# Altium PCB FanControllerv.PcbDoc
Units mm, origin at the board's own origin, x right, y up, seen from the top; angles counter-clockwise.
Board outline 175 x 100 mm, 2 copper layers (Top Layer, Bottom Layer); 92 components, 77 nets, 336 pads, 138 vias.
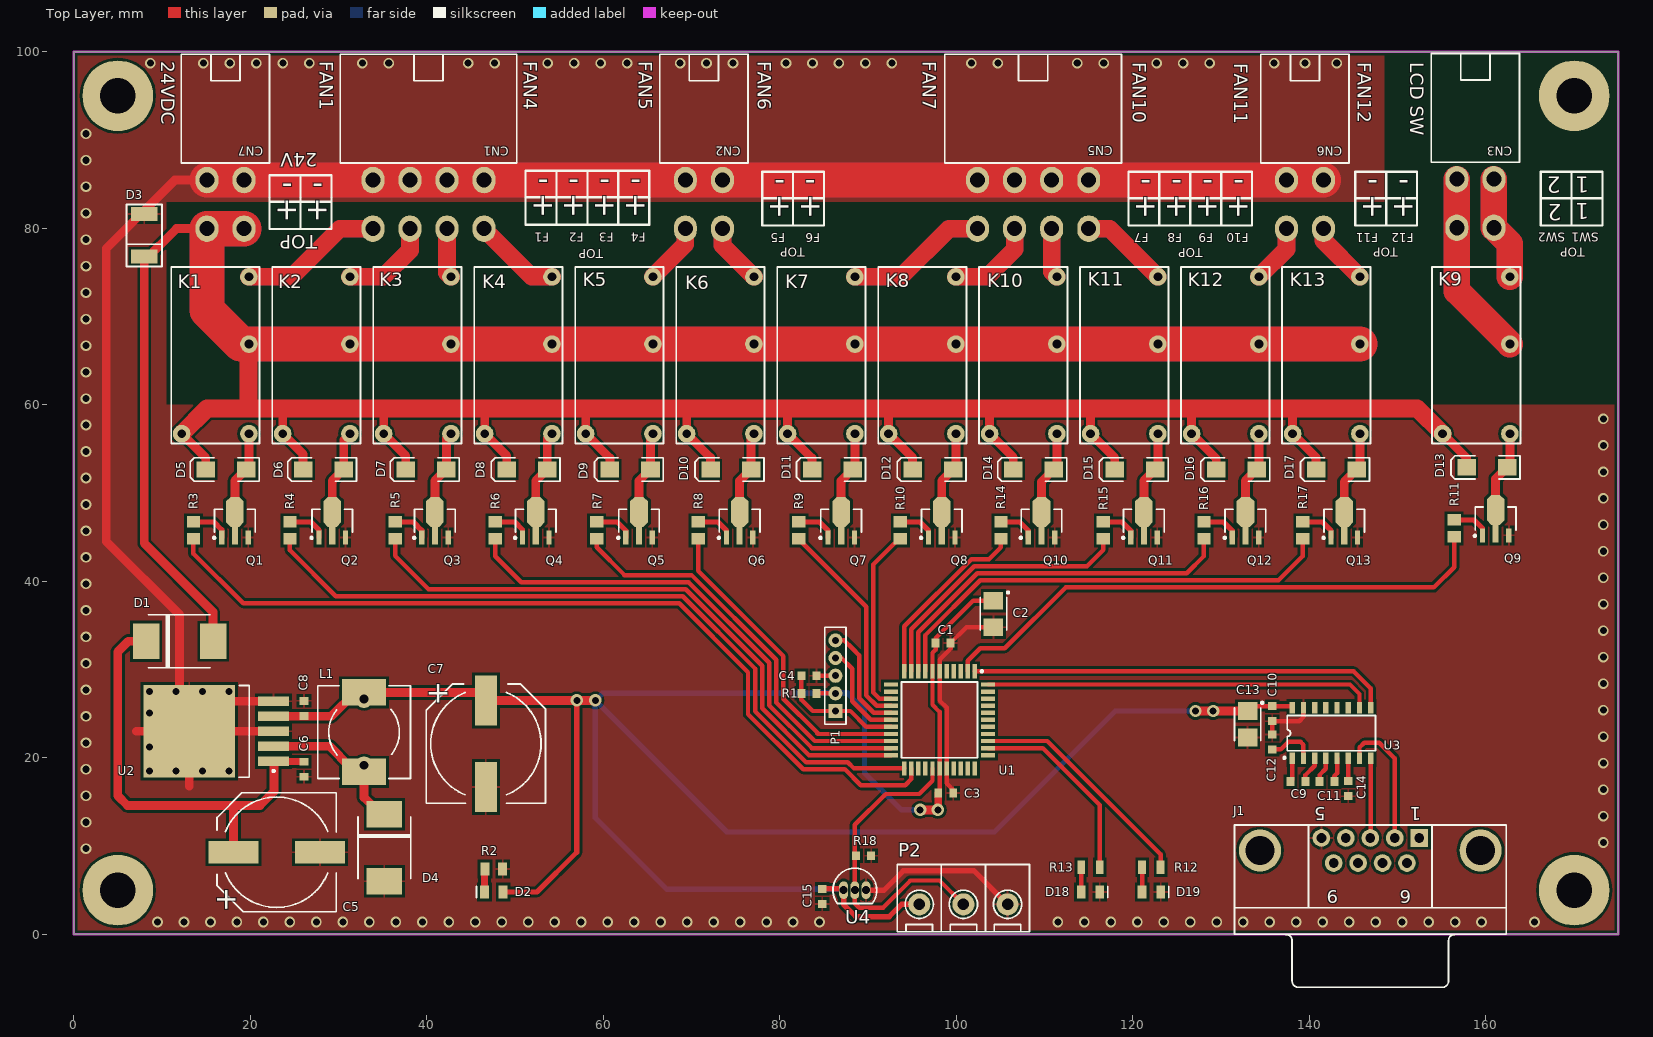
[diagram p0: Top Layer view]
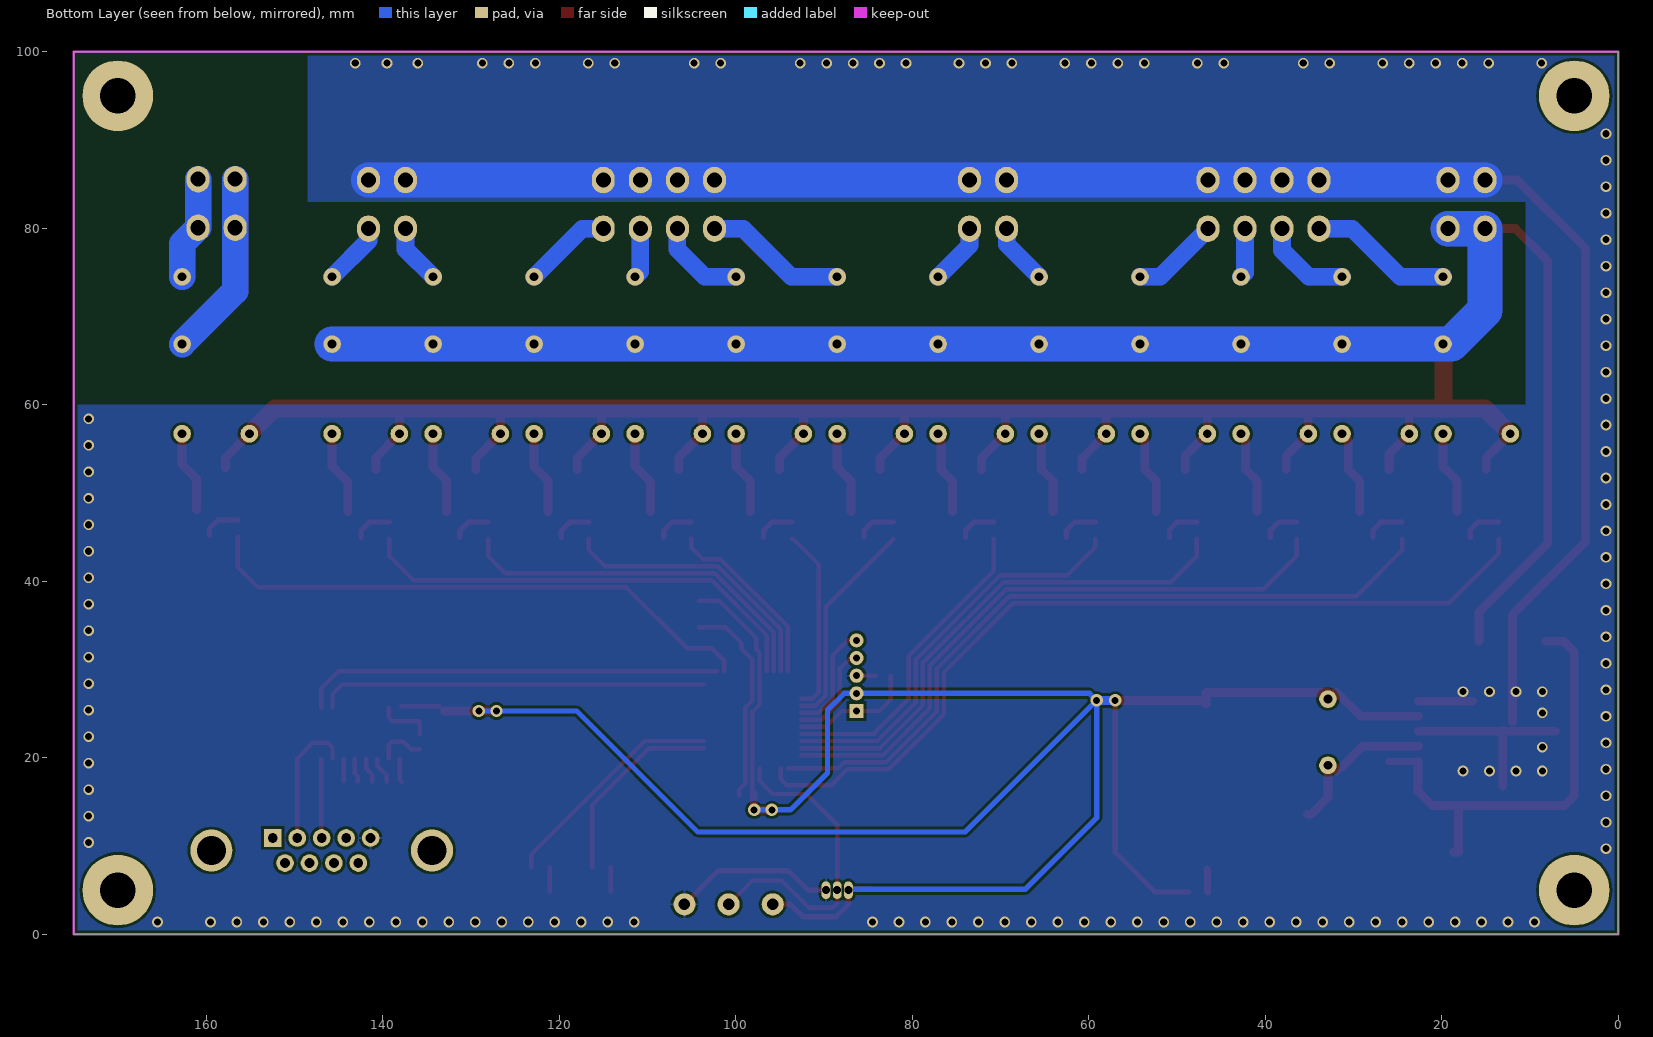
[diagram p1: Bottom Layer view, seen from below]
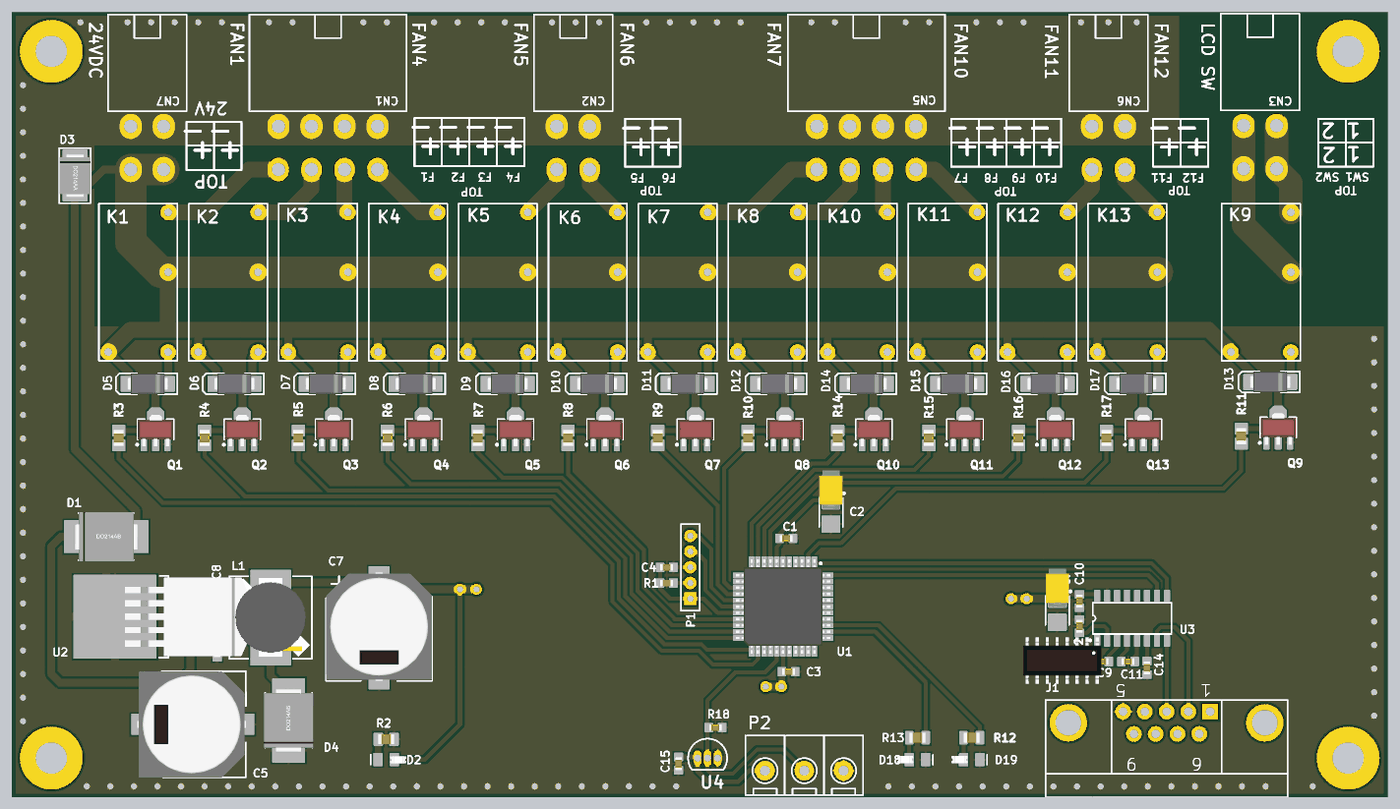
[diagram p2: 3D render of the assembled board from above, using the file's embedded part models]

## Layer stack, top to bottom
Top Layer: signal copper 0.0356
Dielectric: dielectric 0.32, FR-4, Dk 4.8
Bottom Layer: signal copper 0.0356

## Board outline
0,0 175,0 175,100 0,100

## Design rules (kind name [scope] priority, off if disabled: settings)
Clearance [All] p1: gap=0.3
HoleToHoleClearance [All] p1: gap=0.1 allowstackedmicrovias=TRUE
MinimumSolderMaskSliver [All] p1: minsoldermaskwidth=0.1
PasteMaskExpansion [All] p1: expansion=0.1
PlaneConnect [All] p1: planeconnectstyle=Relief reliefexpansion=0.508 reliefentries=4 reliefconductorwidth=0.3 reliefairgap=0.254
PolygonConnect [All] p1: connectstyle=Relief reliefconductorwidth=0.254 reliefentries=4 polygonreliefangle="90 Angle"
RoutingVias [All] p1: holewidth=0.6 width=1 viastyle="Through Hole" minholewidth=0.8 minwidth=1 maxholewidth=1.2 maxwidth=2
SilkscreenOverComponentPads [All] p1: minsilkscreentomaskgap=0.05
SolderMaskExpansion [All] p1: expansion=0.1
TestPointUsage [All] p1: valid=0 allowmultiple=FALSE
Testpoint [All] p1: side=15 testpointundercomponent=TRUE minsize=1.016 maxsize=2.54 preferedsize=1.524 minholesize=0 maxholesize=1.016 preferedholesize=0.813 testpointgrid=0.025 style=1023 order=0-112345678
Width [All] p1: maxlimit=5 minlimit=0.3 preferedwidth=0.3
19 further rules are at their usual default settings.

## Classes and differential pairs
component class Connectors: CN1 CN2 CN3 CN4 CN5 CN6 CN7
component class IO: D5 D6 D7 D8 D9 D10 D11 D12 D13 D14 D15 D16 D17 D18 D19 K1 K2 K3 K4 K5 K6 K7 K8 K9 K10 K11 K12 K13 Q1 Q2 Q3 Q4 Q5 Q6 Q7 Q8 Q9 Q10 Q11 Q12 Q13 R3 R4 R5 R6 R7 R8 R9 R10 R11 R12 R13 R14 R15 R16 R17
component class Main: C1 C2 C3 C4 P1 R1 U1
component class POWER: C5 C6 C7 C8 D1 D2 D3 D4 L1 R2 U2
component class USART: C9 C10 C11 C12 C13 C14 J1 U3
component class Sensor: C15 P2 R18 U4

## Components (designator, comment, footprint, x,y, rotation, side; value= is the part's Value field where it differs from the comment)
C1 "Cap" 3-0603_L 98.5,33 r0 top
C2 "CAP-Tantal" 3528 104.2,36.3 r270 top
C3 "Cap" 3-0603_L 98.8,16 r0 top
C4 "Cap" 3-0603_L 83.3,29.3 r0 top
C5 "Cap Pol1" "CAP Size H13= 12.5x13.8mm" 23,9.3 r90 top
C6 "Cap" 3-0603_L 26.1,18.7 r90 top
C7 "Cap Pol1" "CAP Size H13= 12.5x13.8mm" 46.7,21.6 r0 top
C8 "Cap" 3-0603_L 26.1,25.6 r270 top
C9 "Cap" 3-0603_L 138.7,17.3 r0 top
C10 "Cap" 3-0603_L 135.8,25 r90 top
C11 "Cap" 3-0603_L 142,17.3 r0 top
C12 "Cap" 3-0603_L 135.8,21.8 r270 top
C13 "CAP-Tantal" 3528 133,23.8 r270 top
C14 "Cap" 3-0603_L 144.4,16.5 r90 top
C15 "Cap" 3-0603_L 84.8,4.3 r270 top
CN1 "Connector 4973-08TRNLF" "Connector 4973-08TRNLF" 40.2,82.7 r180 top
CN2 "Connector 4973-04TRNLF" "Connector 4973-04TRNLF" 71.4,82.7 r180 top
CN3 "Connector 4973-04TRNLF" "Connector 4973-04TRNLF" 158.8,82.8 r180 top
CN5 "Connector 4973-08TRNLF" "Connector 4973-08TRNLF" 108.7,82.7 r180 top
CN6 "Connector 4973-04TRNLF" "Connector 4973-04TRNLF" 139.5,82.7 r180 top
CN7 "Connector 4973-04TRNLF" "Connector 4973-04TRNLF" 17.2,82.7 r180 top
D1 "MBRS340T3G" "CASE 403-03 ISSUE E" 12,33.2 r180 top
D2 "LED" "6-0805 - LED" 47.6,4.8 r180 top
D3 "TVS SMAJ48CA" "DO214 AA" 8,79.2 r270 top
D4 "MBRS340T3G" "CASE 403-03 ISSUE E" 35.2,9.8 r90 top
D5 "Diode 1N4007" DO214 17.269,52.667 r180 top
D6 "Diode 1N4007" DO214 28.299,52.667 r180 top
D7 "Diode 1N4007" DO214 39.928,52.667 r180 top
D8 "Diode 1N4007" DO214 51.358,52.667 r180 top
D9 "Diode 1N4007" DO214 63.052,52.667 r180 top
D10 "Diode 1N4007" DO214 74.452,52.667 r180 top
D11 "Diode 1N4007" DO214 85.952,52.667 r180 top
D12 "Diode 1N4007" DO214 97.352,52.667 r180 top
D13 "Diode 1N4007" DO214 160.1,52.9 r180 top
D14 "Diode 1N4007" DO214 108.752,52.667 r180 top
D15 "Diode 1N4007" DO214 120.252,52.667 r180 top
D16 "Diode 1N4007" DO214 131.752,52.667 r180 top
D17 "Diode 1N4007" DO214 143.052,52.667 r180 top
D18 "Yeşil Led" "6-0805 - LED" 115.2,4.8 r0 top
D19 "Kırmızı Led" "6-0805 - LED" 122.1,4.8 r0 top
J1 "D Connector 9" DSUB1.385-2H9 146.9,0 r180 top
K1 "Relay SRS" "RELAY ALQ324" 16.052,65.6 r0 top
K2 "Relay SRS" "RELAY ALQ324" 27.493,65.6 r0 top
K3 "Relay SRS" "RELAY ALQ324" 38.935,65.6 r0 top
K4 "Relay SRS" "RELAY ALQ324" 50.376,65.6 r0 top
K5 "Relay SRS" "RELAY ALQ324" 61.817,65.6 r0 top
K6 "Relay SRS" "RELAY ALQ324" 73.259,65.6 r0 top
K7 "Relay SRS" "RELAY ALQ324" 84.7,65.6 r0 top
K8 "Relay SRS" "RELAY ALQ324" 96.141,65.6 r0 top
K9 "Relay SRS" "RELAY ALQ324" 158.9,65.6 r0 top
K10 "Relay SRS" "RELAY ALQ324" 107.583,65.6 r0 top
K11 "Relay SRS" "RELAY ALQ324" 119.024,65.6 r0 top
K12 "Relay SRS" "RELAY ALQ324" 130.465,65.6 r0 top
K13 "Relay SRS" "RELAY ALQ324" 141.907,65.6 r0 top
L1 "Inductor" EB-221M18G01 32.9,22.9 r180 top
P1 "Header 2mm 5pin" "Header 2mm 5Pin" 86.3,25.3 r90 top
P2 "Connector DG301-5.0 - 3P" "Connector DG301-5.0 - 3P" 98.3,4.1 r0 top
Q1 "BCX56-16" SOT89M 18.269,46.867 r90 top
Q2 "BCX56-16" SOT89M 29.299,46.867 r90 top
Q3 "BCX56-16" SOT89M 40.928,46.867 r90 top
Q4 "BCX56-16" SOT89M 52.358,46.867 r90 top
Q5 "BCX56-16" SOT89M 64.052,46.867 r90 top
Q6 "BCX56-16" SOT89M 75.452,46.867 r90 top
Q7 "BCX56-16" SOT89M 86.952,46.867 r90 top
Q8 "BCX56-16" SOT89M 98.352,46.867 r90 top
Q9 "BCX56-16" SOT89M 161.1,47.1 r90 top
Q10 "BCX56-16" SOT89M 109.652,46.867 r90 top
Q11 "BCX56-16" SOT89M 121.252,46.867 r90 top
Q12 "BCX56-16" SOT89M 132.752,46.867 r90 top
Q13 "BCX56-16" SOT89M 143.952,46.867 r90 top
R1 "Res1" 3-0603_L 83.3,27.3 r0 top
R2 "Res1" 6-0805_M 47.6,7.4 r180 top
R3 "Res1" 6-0805 13.569,45.767 r90 top
R4 "Res1" 6-0805 24.499,45.767 r90 top
R5 "Res1" 6-0805 36.428,45.767 r90 top
R6 "Res1" 6-0805 47.758,45.767 r90 top
R7 "Res1" 6-0805 59.252,45.767 r90 top
R8 "Res1" 6-0805 70.752,45.767 r90 top
R9 "Res1" 6-0805 82.152,45.767 r90 top
R10 "Res1" 6-0805 93.652,45.767 r90 top
R11 "Res1" 6-0805 156.4,46 r90 top
R12 "Res1" "6-0805 - big" 122.1,7.6 r0 top
R13 "Res1" "6-0805 - big" 115.2,7.6 r0 top
R14 "Res1" 6-0805 105.052,45.767 r90 top
R15 "Res1" 6-0805 116.652,45.767 r90 top
R16 "Res1" 6-0805 128.052,45.767 r90 top
R17 "Res1" 6-0805 139.252,45.767 r90 top
R18 "Res1" 3-0603_L 89.5,8.9 r180 top
U1 "PIC16F887" TQFP-44 98.1,24.3 r270 top
U2 "LM2576S-5.0" TS5B_M 16.6,23 r180 top
U3 "MAX232ID" "SOIC16 - big" 142.5,22.8 r0 top
U4 "LM35DZ" TO-92 88.5,5 r270 top

## Footprints (in the part's own frame and the unit in brackets; to place one, negate y for a bottom-side part, rotate by r counter-clockwise, add the part's x,y. Pads: shape width x height; smd on the part's side, far side on the other; paste and mask are expansions set on the pad)
3-0603_L [mm] "Chip Resistor; Body 1.6 x 0.9 mm (LxW typ)"
  rect 0.9x1 smd: 1(-0.85,0) 2(0.85,0)
  body extent -0.81,-0.41 0.81,0.41, height 0.46
6-0805 [mm] "Chip Resistor; Body 2 x 1.2 mm (LxW typ)"
  rect 1.3x1.5 smd: 1(-0.95,0) 2(0.95,0)
  body extent -1.01,-0.63 1.01,0.64, height 0.61
"6-0805 - big" [mm] "Chip Resistor; Body 2 x 1.2 mm (LxW typ)"
  rect 0.9x1.5 smd: 1(-1.05,0) 2(1.05,0)
  body extent -1.01,-0.63 1.01,0.64, height 0.61
"6-0805 - LED" [mm] "Chip LED"
  rect 1x1.5 smd: 1(-1.05,0) 2(1.05,0)
  silkscreen extent 1.96,-0.63 1.96,0.62, body extent -1.03,-0.45 1.03,0.46, height 0.85
6-0805_M [mm] "Chip Resistor; Body 2 x 1.2 mm (LxW typ)"
  rect 1x1.5 smd: 1(-1,0) 2(1,0)
  body extent -1.01,-0.63 1.01,0.64, height 0.61
3528 [mm] "Capacitor, SM Tantalum; Body 3.5 x 2.8 mm (LxW typ)"
  rect 2x2.2 smd: 1(-1.5,0) 2(1.5,0)
  silkscreen extent -2.55,-1.5 1.85,1.78, body extent -2.5,-1.5 2.5,1.5, height 2.11
"CAP Size H13= 12.5x13.8mm" [mm]
  rect 2.5x5.7 smd: 1(0,4.9) 2(0,-4.9)
  silkscreen extent -6.75,-6.76 6.75,6.75, body extent -6.75,-6.76 6.75,7.04, height 13.5
"CASE 403-03 ISSUE E" [mm] "CASE 403-03 ISSUE E"
  rect 3x4 smd: 1(-3.8,0) 2(3.8,0)
  silkscreen extent -3.48,-3 3.53,3, body extent -4.06,-3.14 4.06,3.16, height 2.67
"Connector 4973-04TRNLF" [mm]
  oval 2.6x3 hole 1.7: 1(-2.1,-2.75) 2(-2.1,2.75) 3(2.1,-2.75) 4(2.1,2.75)
  silkscreen extent -5,-17 5,-4.67
"Connector 4973-08TRNLF" [mm]
  oval 2.6x3 hole 1.7: 1(-6.3,-2.75) 2(-6.3,2.75) 3(-2.1,-2.75) 4(-2.1,2.75) 5(2.1,-2.75) 6(2.1,2.75) 7(6.3,-2.75) 8(6.3,2.75)
  silkscreen extent -10,-17 10,-4.67
"Connector DG301-5.0 - 3P" [mm]
  round 2.5 hole 1.3: 1(-2.5,-0.7) 2(2.5,-0.7) 3(7.5,-0.7)
  silkscreen extent -5,-3.8 10,3.8
DO214 [mm] "DO-214-AC/SMA; 2 C-Bend Leads; Body 5.3 x 2.6 mm, inc. leads (LxW)"
  rect 2.1x1.85 smd: 1(-2.3,0) 2(2.3,0)
  silkscreen extent -3.75,-1.33 4.05,1.33, body extent -2.6,-1.3 2.6,1.3, height 2.4
"DO214 AA" [mm] "DO-214-AA/SMB; 2 C-Bend Leads; Body 5.6 x 3.9 mm, inc. leads (LxW)"
  rect 1.6x3 smd: 1(-2.4,0) 2(2.4,0)
  silkscreen extent -3.48,-2 3.53,2, body extent -2.76,-1.95 2.82,2, height 2.65
DSUB1.385-2H9 [mm] "Connector; D Subminiature; 9 Position; Right Angle; Pitch 1.385 mm"
  rect 2x2 hole 1.1: 1(-5.54,-10.92)
  round 2 hole 1.1: 2(-2.77,-10.92) 3(0,-10.92) 4(2.77,-10.92) 5(5.54,-10.92) 6(-4.155,-8.08) 7(-1.385,-8.08) 8(1.385,-8.08) 9(4.155,-8.08)
  round 4.76 hole 3.26: 10(-12.495,-9.5) 11(12.495,-9.5)
  silkscreen extent -15.4,-12.4 15.4,6
EB-221M18G01 [mm]
  rect 5x3 smd: 1(0,4.5) 2(0,-4.5)
  round 2 hole 1: 1(0,3.75) 2(0,-3.75)
  silkscreen extent -5.25,-5.25 5.25,5.25, body extent -5,-5.02 5,4.98, height 4.7
"Header 2mm 5Pin" [mm] "10 pin header"
  rect 1.6x1.6 hole 0.8: 1(0,0)
  round 1.6 hole 0.8: 2(2,0) 3(4,0) 4(6,0) 5(8,0)
  silkscreen extent -1.5,-1.2 9.5,1.2
"RELAY ALQ324" [mm] "24V - 5A Relay"
  round 2 hole 1: 1(3.81,8.89) 2(3.81,1.27) 3(-3.81,-8.89) 4(3.81,-8.89)
  silkscreen extent -5,-10 5,10, body extent -4.99,-9.99 5,9.98, height 15.6
"SOIC16 - big" [mm]
  rect 0.6x1.3 smd: 1(-4.445,-2.875) 2(-3.175,-2.875) 3(-1.905,-2.875) 4(-0.635,-2.875) 5(0.635,-2.875) 6(1.905,-2.875) 7(3.175,-2.875) 8(4.445,-2.875) 9(4.45,2.875) 10(3.175,2.875) 11(1.905,2.875) 12(0.635,2.875) 13(-0.635,2.875) 14(-1.905,2.875) 15(-3.175,2.875) 16(-4.445,2.875)
  silkscreen extent -5.45,-2.92 5,2, body extent -5,-2.95 4.98,2.95, height 1.45
SOT89M [mm] "SOT89, 3-Leads, Body 4.5x2.4 mm, Pitch 1.5mm, Lead Span 4.1mm, IPC Low Density"
  rect 1.6x0.6 smd: 1(-1.9,1.5) 3(-1.9,-1.5)
  rect 2x0.7 smd: 2(-1.7,0)
  oct 3.4x2 smd: 2(1,0)
  silkscreen extent -2.07,-2.3 1.3,2.47, body extent -2.18,-2.3 1.82,2.3, height 1.6
TO-92 [mm]
  oval 2x1 hole 0.9: 1(0,-1.27) 2(0,0) 3(0,1.27)
  silkscreen extent -2.48,-2.48 1.5,2.48
TQFP-44 [mm]
  rect 1.6x0.5 smd: 1(-5.5,4) 2(-5.5,3.2) 3(-5.5,2.4) 4(-5.5,1.6) 5(-5.5,0.8) 6(-5.5,0) 7(-5.5,-0.8) 8(-5.5,-1.6) 9(-5.5,-2.4) 10(-5.5,-3.2) 11(-5.5,-4) 23(5.5,-4) 24(5.5,-3.2) 25(5.5,-2.4) 26(5.5,-1.6) 27(5.5,-0.8) 28(5.5,0) 29(5.5,0.8) 30(5.5,1.6) 31(5.5,2.4) 32(5.5,3.2) 33(5.5,4)
  rect 0.5x1.6 smd: 12(-4,-5.5) 13(-3.2,-5.5) 14(-2.4,-5.5) 15(-1.6,-5.5) 16(-0.8,-5.5) 17(0,-5.5) 18(0.8,-5.5) 19(1.6,-5.5) 20(2.4,-5.5) 21(3.2,-5.5) 22(4,-5.5) 34(4,5.5) 35(3.2,5.5) 36(2.4,5.5) 37(1.6,5.5) 38(0.8,5.5) 39(0,5.5) 40(-0.8,5.5) 41(-1.6,5.5) 42(-2.4,5.5) 43(-3.2,5.5) 44(-4,5.5)
  silkscreen extent -5.62,-4.3 4.3,4.93, body extent -6,-6 6,6, height 1.1
TS5B_M [mm] "D2-PAK, 6-Leads, Body 8.6x10.2mm, Pitch 1.7mm, Lead Span 14.1mm, IPC Low Density"
  rect 3.5x1.1 smd: 1(-6.05,3.4) 2(-6.05,1.7) 3(-6.05,0) 4(-6.05,-1.7) 5(-6.05,-3.4)
  rect 10.4x10.5 smd: 6(3.5,0)
  silkscreen extent -6.18,-5.2 -2.11,5.2, body extent -7.73,-5 7.94,5, height 4.78

## Part data
C1 C3 C4 C6 C8 C9 C10 C11 C12 C14 C15: "Capacitor"
C2 C13: "Tantamount Military, Surface Mount MIL-PRF-55365/8 Qualified Solid Tantalum Chip Capacitor: 6.8uF, 20% Tolerance, 6 WVDC @ +85°C, Surge = 8V"
C5 C7: "Polarized Capacitor (Radial)"
CN1 CN5: "Connector 8-Pin, 90 degree, 3.5mm"
CN2 CN3 CN6 CN7: "Connector 4-Pin, 90 degree, 3.5mm"
D1 D4: "3 Amp Shotky Rectifier"
D2: "Typical INFRARED GaAs LED"
D5 D6 D7 D8 D9 D10 D11 D12 D13 D14 D15 D16 D17: "1 Amp General Purpose Rectifier"
D18 D19: library part LED, "Typical INFRARED GaAs LED"
J1: "Receptacle Assembly, 9 Position, Right Angle"
K1 K2 K3 K4 K5 K6 K7 K8 K9 K10 K11 K12 K13: library part "Relay ALQ324", "Relay ALQ324"
P1: "Header 2mm , 5-Pin"
P2: "Connector, 3-Pin"
Q1 Q2 Q3 Q4 Q5 Q6 Q7 Q8 Q9 Q10 Q11 Q12 Q13: "NPN General-purpose Transistor"
R1 R2 R3 R4 R5 R6 R7 R8 R9 R10 R11 R12 R13 R14 R15 R16 R17 R18: "Resistor"
U1: "EPROM-Based 8-Bit CMOS Microcontroller"
U2: "SIMPLE SWITCHER; 3A Step-Down Voltage Regulator"
U3: "5V, Low-Power, up to 1Mbps, True RS-232 Transceiver Using Four 0.1µF External Capacitor"
U4: "Temperature Sensor"

## Free pads (board coordinates)
  round 8 hole 4: 0(5,5) 0(5,95) 0(170,5) 0(170,95)

## Via types
v1: diameter 1.2, hole 0.8, Top Layer to Bottom Layer, tented both sides, 132 vias
v2: diameter 1.4, hole 0.8, Top Layer to Bottom Layer, 6 vias

## Nets (pads, with @x,y where several pads share a name; then routed paths per layer and width w, separated by ;. In a path a pad name is that pad's centre, name@x,y a point inside that pad or via, vN(x,y) a via of type N, cw(c..) or ccw(c..) an arc to the next point about the centre after c; other vN are vias at no path point)
"+24V INPUT": CN7.2 CN7.4 D1.1 D3.2 D5.2 D6.2 D7.2 D8.2 D9.2 D10.2 D11.2 D12.2 D13.2 D14.2 D15.2 D16.2 D17.2 K1.2 K1.3 K2.2 K2.3 K3.2 K3.3 K4.2 K4.3 K5.2 K5.3 K6.2 K6.3 K7.2 K7.3 K8.2 K8.3 K9.3 K10.2 K10.3 K11.2 K11.3 K12.2 K12.3 K13.2 K13.3 | length 594.6
  Top Layer w1: 8,52.2 8,53.1 ; K1.3 14.969,53.983 D5.2 ; CN7.4 11.65,79.95 8,76.3 8,53.1 ; D1.1 15.8,36.5 8,44.3 8,53.1 ; 23.683,59.151 K2.3 25.999,54.395 D6.2 ; 35.125,59.393 K3.3 37.628,54.206 D7.2 ; 46.566,59.434 K4.3 49.058,54.218 D8.2 ; 58.007,59.461 K5.3 60.752,53.965 D9.2 ; 69.449,59.317 K6.3 72.152,54.007 D10.2 ; 80.89,59.258 K7.3 83.652,53.948 D11.2 ; 92.331,59.537 K8.3 95.052,53.99 D12.2 ; 103.773,59.495 K10.3 106.452,54.031 D14.2 ; 115.214,59.554 K11.3 117.952,53.972 D15.2 ; 126.655,59.513 K12.3 129.452,53.914 D16.2 ; 138.097,59.465 K13.3 140.752,54.055 D17.2 ; K9.3 157.8,54 D13.2
  Top Layer w2: K1.3 15.1,59.568 152.232,59.568 K9.3 ; K1.2@18.93,66.87 19.8,66 19.8,60.438
  Top Layer w4: K1.2@18.93,66.87 15.1,70.7 CN7.4 CN7.2 ; K1.2 K2.2 K3.2 K4.2 K5.2 K6.2 K7.2 K8.2 K10.2 K11.2 K12.2 K13.2
  Bottom Layer w4: CN7.2 CN7.4 15.1,70.7 18.93,66.87 K1.2 K2.2 K3.2 K4.2 K5.2 K6.2 K7.2 K8.2 K10.2 K11.2 K12.2 K13.2
GND: C1.2 C2.2 C3.2 C4.2 C5.2 C6.1 C7.2 C8.1 C10.1 C12.1 C13.2 C14.1 C15.2 CN1.1 CN1.3 CN1.5 CN1.7 CN2.1 CN2.3 CN5.1 CN5.3 CN5.5 CN5.7 CN6.1 CN6.3 CN7.1 CN7.3 D3.1 D4.1 D18.2 D19.2 J1.5 P1.3 P2.3 Q1.3 Q2.3 Q3.3 Q4.3 Q5.3 Q6.3 Q7.3 Q8.3 Q9.3 Q10.3 Q11.3 Q12.3 Q13.3 R2.1 R18.1 U1.6 U1.29 U2.3 U2.5 U2.6 U3.15 U4.3 | length 403.6
  Top Layer w0.5: C4.2 P1.3 ; C3.2@99.6,15.75 99.6,16.4 98.9,17.1 U1.29 98.9,25.7 98.1,26.5 U1.6 98.1,31.1 99.35,32.35 C1.2 101.15,34.8 C2.2 ; C12.1 C10.1 138.85,24.15 139.325,24.625 U3.15
  Top Layer w0.6: U4.3 91.8,5 94,7.2 102,7.2 P2.3
  Top Layer w1: 7.1,23 U2.6 ; U2.6@12,24.1 12,36.2 3.7,44.5 3.7,77.7 11.45,85.45 CN7.3 ; U2.6@13,23.1 U2.6 ; 13.1,16.8 U2.6 ; U2.6@16.5,26.4 U2.5 ; U2.3 U2.6
  Top Layer w4: CN7.3 CN7.1 CN1.3 CN2.3 CN5.7 CN6.1
  Bottom Layer w4: CN7.3 CN7.1 CN1.5 CN2.3 CN5.1 CN6.1
  other v1: 9.5,1.4 12.5,1.4 15.5,1.4 18.5,1.4 21.5,1.4 24.5,1.4 27.5,1.4 30.5,1.4 33.5,1.4 36.5,1.4 39.5,1.4 42.5,1.4 45.5,1.4 48.5,1.4 51.5,1.4 54.5,1.4 57.5,1.4 60.5,1.4 63.5,1.4 66.5,1.4 69.5,1.4 72.5,1.4 75.5,1.4 78.5,1.4 81.5,1.4 84.5,1.4 111.5,1.4 114.5,1.4 117.5,1.4 120.5,1.4 123.5,1.4 126.5,1.4 129.5,1.4 132.5,1.4 135.5,1.4 138.5,1.4 141.5,1.4 144.5,1.4 147.5,1.4 150.5,1.4 153.5,1.4 156.5,1.4 159.5,1.4 165.5,1.4 1.4,9.7 173.3,10.4 1.4,12.7 173.3,13.4 1.4,15.7 173.3,16.4 8.6,18.5 11.6,18.5 14.6,18.5 17.6,18.5 1.4,18.7 173.3,19.4 8.6,21.2 1.4,21.7 173.3,22.4 1.4,24.7 8.6,25.1 173.3,25.4 8.6,27.5 11.6,27.5 14.6,27.5 17.6,27.5 1.4,27.7 173.3,28.4 1.4,30.7 173.3,31.4 1.4,33.7 173.3,34.4 1.4,36.7 173.3,37.4 1.4,39.7 173.3,40.4 1.4,42.7 173.3,43.4 1.4,45.7 173.3,46.4 1.4,48.7 173.3,49.4 1.4,51.7 173.3,52.4 1.4,54.7 173.3,55.4 1.4,57.7 173.3,58.4 1.4,60.7 1.4,63.7 1.4,66.7 1.4,69.7 1.4,72.7 1.4,75.7 1.4,78.7 1.4,81.7 1.4,84.7 1.4,87.7 1.4,90.7 1.4,90.7 8.7,98.7 14.7,98.7 17.7,98.7 20.7,98.7 23.7,98.7 26.7,98.7 32.7,98.7 35.7,98.7 44.7,98.7 47.7,98.7 53.7,98.7 56.7,98.7 59.7,98.7 62.7,98.7 68.7,98.7 71.7,98.7 74.7,98.7 80.7,98.7 83.7,98.7 86.7,98.7 89.7,98.7 92.7,98.7 101.7,98.7 104.7,98.7 113.7,98.7 116.7,98.7 122.7,98.7 125.7,98.7 128.7,98.7 136,98.7 139.5,98.7 143.1,98.7
NetC4_1: C4.1 P1.1 R1.1 U1.18 | length 14.1
  Top Layer w0.5: C4.1 R1.1 82.45,26.575 83.725,25.3 P1.1 88,25.3 89.8,23.5 U1.18
NetC5_1: C5.1 C6.2 D1.2 U2.1 | length 51.5
  Top Layer w0.8: U2.1@22.7,19.6 C6.2@26.05,19.6
  Top Layer w1: D1.2 6.2,33.2 5,32 5,15.7 6.1,14.6 18.1,14.6 ; C5.1@18.7,9.3 C5.1 18.1,14.6 ; U2.1@22.7,19.6 22.7,16.2 21.1,14.6 18.1,14.6
NetC9_1: C9.1 U3.1 | length 2.7
  Top Layer w0.5: C9.1 138.055,17.505 U3.1
NetC9_2: C9.2 U3.3 | length 3.1
  Top Layer w0.5: C9.2 139.55,18.05 140.595,19.095 U3.3
NetC11_1: C11.1 U3.4 | length 2.9
  Top Layer w0.5: C11.1 141.15,18.05 141.865,18.765 U3.4
NetC11_2: C11.2 U3.5 | length 2.8
  Top Layer w0.5: C11.2 142.8,17.35 142.8,17.9 143.135,18.235 U3.5
NetC12_2: C12.2 U3.2 | length 5.6
  Top Layer w0.5: C12.2 136.75,20.95 137.6,21.8 139,21.8 139.325,21.475 U3.2
NetC14_2: C14.2 U3.6 | length 2.6
  Top Layer w0.5: C14.2 144.405,17.355 U3.6
NetCN1_2: CN1.2 K4.1 | length 20
  Top Layer w2: CN1.2 46.5,79.9 51.91,74.49 K4.1
  Bottom Layer w2: CN1.2 46.5,79.9 51.91,74.49 K4.1
NetCN1_4: CN1.4 K3.1 | length 11.3
  Top Layer w2: CN1.4 42.3,74.935 K3.1
  Bottom Layer w2: CN1.4 42.3,74.935 K3.1
NetCN1_6: CN1.6 K2.1 | length 21
  Top Layer w2: K2.1 35.09,74.49 38.1,77.5 CN1.6
  Bottom Layer w2: K2.1 35.09,74.49 38.1,77.5 CN1.6
NetCN1_8: CN1.8 K1.1 | length 32.6
  Top Layer w2: K1.1 24.69,74.49 30.15,79.95 CN1.8
  Bottom Layer w2: K1.1 24.69,74.49 30.15,79.95 CN1.8
NetCN2_2: CN2.2 K6.1 | length 13.9
  Top Layer w2: CN2.2 73.5,78.059 K6.1
  Bottom Layer w2: CN2.2 73.5,78.059 K6.1
NetCN2_4: CN2.4 K5.1 | length 14
  Top Layer w2: K5.1 69.3,78.163 CN2.4
  Bottom Layer w2: K5.1 69.3,78.163 CN2.4
NetCN3_1: CN3.1 CN3.2 K9.1 | length 23.6
  Top Layer w3: CN3.1 CN3.2 162.71,78.24 K9.1
  Bottom Layer w3: CN3.1 CN3.2 162.71,78.24 K9.1
NetCN3_3: CN3.3 CN3.4 K9.2 | length 42.3
  Top Layer w3: CN3.3 CN3.4 156.7,72.88 K9.2
  Bottom Layer w3: CN3.3 CN3.4 156.7,72.88 K9.2
NetCN5_2: CN5.2 K11.1 | length 20.2
  Top Layer w2: CN5.2 117.374,79.95 K11.1
  Bottom Layer w2: CN5.2 117.374,79.95 K11.1
NetCN5_4: CN5.4 K10.1 | length 11.4
  Top Layer w2: CN5.4 110.8,75.083 K10.1
  Bottom Layer w2: CN5.4 110.8,75.083 K10.1
NetCN5_6: CN5.6 K8.1 | length 20.6
  Top Layer w2: K8.1 103.49,74.49 106.6,77.6 CN5.6
  Bottom Layer w2: K8.1 103.49,74.49 106.6,77.6 CN5.6
NetCN5_8: CN5.8 K7.1 | length 32.3
  Top Layer w2: K7.1 93.71,74.49 99.17,79.95 CN5.8
  Bottom Layer w2: K7.1 93.69,74.49 99.15,79.95 CN5.8
NetCN6_2: CN6.2 K13.1 | length 14.3
  Top Layer w2: CN6.2 141.6,78.607 K13.1
  Bottom Layer w2: CN6.2 141.6,78.607 K13.1
NetCN6_4: CN6.4 K12.1 | length 13.5
  Top Layer w2: K12.1 137.4,77.615 CN6.4
  Bottom Layer w2: K12.1 137.4,77.615 CN6.4
NetD2_2: D2.2 R2.2 | length 2.6
  Top Layer w0.8: D2.2 46.55,7.35 R2.2
NetD4_2: D4.2 L1.1 U2.2 | length 16.4
  Top Layer w0.8: L1.1@31.35,18.95 L1.1@31.9,18.4
  Top Layer w1: U2.2 29,21.3 L1.1@31.35,18.95 ; L1.1@32.9,18.4 32.9,15.5 34.8,13.6 D4.2
NetD5_1: D5.1 K1.4 Q1.2 | length 9.5
  Top Layer w1: Q1.2@18.269,47.867 18.269,51.367 D5.1 19.862,52.96 K1.4
NetD6_1: D6.1 K2.4 Q2.2 | length 9.7
  Top Layer w1: Q2.2@29.299,47.867 29.299,51.367 D6.1 30.599,56.005 K2.4
NetD7_1: D7.1 K3.4 Q3.2 | length 9.6
  Top Layer w1: Q3.2@40.928,47.867 40.928,51.367 D7.1 42.228,56.194 K3.4
NetD8_1: D8.1 K4.4 Q4.2 | length 9.6
  Top Layer w1: Q4.2@52.358,47.867 52.358,51.367 D8.1 53.658,56.182 K4.4
NetD9_1: D9.1 K5.4 Q5.2 | length 9.5
  Top Layer w1: Q5.2@64.052,47.867 64.052,51.367 D9.1 65.352,56.435 K5.4
NetD10_1: D10.1 K6.4 Q6.2 | length 9.5
  Top Layer w1: Q6.2@75.452,47.867 75.452,51.367 D10.1 76.752,56.393 K6.4
NetD11_1: D11.1 K7.4 Q7.2 | length 9.5
  Top Layer w1: Q7.2@86.952,47.867 86.952,51.367 D11.1 88.51,52.925 K7.4
NetD12_1: D12.1 K8.4 Q8.2 | length 9.5
  Top Layer w1: Q8.2@98.352,47.867 98.352,51.367 D12.1 99.951,52.967 K8.4
NetD13_1: D13.1 K9.4 Q9.2 | length 9.3
  Top Layer w1: Q9.2@161.1,48.1 161.1,51.6 D13.1 162.71,53.21 K9.4
NetD14_1: D14.1 K10.4 Q10.2 | length 9.6
  Top Layer w1: Q10.2@109.652,47.867 109.652,51.267 D14.1 111.393,53.008 K10.4
NetD15_1: D15.1 K11.4 Q11.2 | length 9.5
  Top Layer w1: Q11.2@121.252,47.867 121.252,51.367 D15.1 122.834,52.949 K11.4
NetD16_1: D16.1 K12.4 Q12.2 | length 9.5
  Top Layer w1: Q12.2@132.752,47.867 132.752,51.367 D16.1 134.275,52.891 K12.4
NetD17_1: D17.1 K13.4 Q13.2 | length 9.6
  Top Layer w1: Q13.2@143.952,47.867 143.952,51.267 D17.1 145.717,53.032 K13.4
NetD18_1: D18.1 R13.1 | length 2.8
  Top Layer w0.5: D18.1 R13.1
NetD19_1: D19.1 R12.1 | length 2.8
  Top Layer w0.5: D19.1 R12.1
NetJ1_2: J1.2 U3.7 | length 16.1
  Top Layer w0.5: U3.7 145.675,21.175 146.2,21.7 147.9,21.7 149.67,19.93 J1.2 J1.2@149.67,11.77
NetJ1_3: J1.3 U3.8 | length 9.3
  Top Layer w0.5: J1.3@146.9,11.2 J1.3 146.945,10.965 U3.8
NetP1_4: P1.4 U1.17 | length 11.4
  Top Layer w0.5: P1.4 87,31.3 88.2,30.1 88.2,26.406 90.306,24.3 U1.17
NetP1_5: P1.5 U1.16 | length 12.5
  Top Layer w0.5: P1.5 87.3,33.3 88.2,32.4 89,31.6 89,26.737 90.637,25.1 U1.16
NetP2_2: P2.2 R18.2 U1.27 U4.2 | length 36
  Top Layer w0.5: U4.2 88.5,3.5 89,3 91.7,3 94.8,6.1 98.1,6.1 P2.2 ; U4.2@88.5,5.1 88.5,12.4 92,15.9 95.8,15.9 97.3,17.4 U1.27
NetQ1_1: Q1.1 R3.2 | length 4.4
  Top Layer w0.6: R3.2 15.883,46.717 16.769,45.831 Q1.1
NetQ2_1: Q2.1 R4.2 | length 4.5
  Top Layer w0.6: R4.2 26.883,46.717 27.799,45.801 Q2.1
NetQ3_1: Q3.1 R5.2 | length 4.2
  Top Layer w0.6: R5.2 38.483,46.717 39.428,45.772 Q3.1
NetQ4_1: Q4.1 R6.2 | length 4.3
  Top Layer w0.6: R6.2 49.983,46.717 50.858,45.842 Q4.1
NetQ5_1: Q5.1 R7.2 | length 4.5
  Top Layer w0.6: R7.2 61.583,46.717 62.552,45.748 Q5.1
NetQ6_1: Q6.1 R8.2 | length 4.4
  Top Layer w0.6: R8.2 72.983,46.717 73.952,45.748 Q6.1
NetQ7_1: Q7.1 R9.2 | length 4.5
  Top Layer w0.6: R9.2 84.483,46.717 85.452,45.748 Q7.1
NetQ8_1: Q8.1 R10.2 | length 4.4
  Top Layer w0.6: R10.2 95.883,46.717 96.852,45.748 Q8.1
NetQ9_1: Q9.1 R11.2 | length 4.4
  Top Layer w0.6: R11.2 158.65,46.95 159.6,46 Q9.1
NetQ10_1: Q10.1 R14.2 | length 4.3
  Top Layer w0.6: R14.2 107.183,46.717 108.152,45.748 Q10.1
NetQ11_1: Q11.1 R15.2 | length 4.3
  Top Layer w0.6: R15.2 118.783,46.717 119.752,45.748 Q11.1
NetQ12_1: Q12.1 R16.2 | length 4.4
  Top Layer w0.6: R16.2 130.283,46.717 131.252,45.748 Q12.1
NetQ13_1: Q13.1 R17.2 | length 4.4
  Top Layer w0.6: R17.2 141.483,46.717 142.452,45.748 Q13.1
NetR3_1: R3.1 U1.24 | length 98.2
  Top Layer w0.5: R3.1 13.569,43.131 19.2,37.5 68.6,37.5 76.4,29.7 76.4,24.943 82.643,18.7 87.375,18.7 89.175,16.9 94.2,16.9 94.9,17.6 U1.24
NetR4_1: R4.1 U1.23 | length 84
  Top Layer w0.5: R4.1 24.499,43.501 29.7,38.3 69.006,38.3 77.2,30.106 77.2,25.275 82.975,19.5 87.706,19.5 88.406,18.8 U1.23
NetR5_1: R5.1 U1.22 | length 70.3
  Top Layer w0.5: R5.1 36.428,42.872 40.2,39.1 69.337,39.1 78,30.437 78,25.606 83.306,20.3 U1.22
NetR6_1: R6.1 U1.21 | length 58.7
  Top Layer w0.5: R6.1 47.758,42.842 50.7,39.9 69.669,39.9 78.8,30.769 78.8,25.937 83.637,21.1 U1.21
NetR7_1: R7.1 U1.20 | length 46.2
  Top Layer w0.5: R7.1 59.252,43.848 62.4,40.7 70,40.7 79.6,31.1 79.6,26.269 83.969,21.9 U1.20
NetR8_1: R8.1 U1.19 | length 36
  Top Layer w0.5: R8.1 70.752,41.174 80.4,31.525 80.4,26.7 84.3,22.8 ; 84.25,22.75 84.3,22.7 U1.19
NetR9_1: R9.1 U1.15 | length 24.2
  Top Layer w0.5: R9.1 82.152,44.748 89.8,37.1 89.8,27.069 90.969,25.9 U1.15
NetR10_1: R10.1 U1.14 | length 21.1
  Top Layer w0.5: U1.14 91.3,26.7 90.6,27.4 90.6,41.9 93.517,44.817 R10.1
NetR11_1: R11.1 U1.2 | length 64.1
  Top Layer w0.5: U1.2 101.3,31 102.7,32.4 105.5,32.4 112.4,39.3 154.1,39.3 156.4,41.6 R11.1
NetR12_2: R12.2 U1.36 | length 26.3
  Top Layer w0.5: U1.36 110.3,21.9 123.15,9.05 R12.2
NetR13_2: R13.2 U1.35 | length 22.4
  Top Layer w0.5: U1.35 109.8,21.1 116.25,14.65 R13.2
NetR14_1: R14.1 U1.11 | length 20.8
  Top Layer w0.5: U1.11 94.1,34.894 101.706,42.5 103.7,42.5 105.052,43.852 R14.1 105.069,44.8 R14.1@105.1,44.8
NetR15_1: R15.1 U1.10 | length 31.5
  Top Layer w0.5: U1.10 94.9,34.563 102.037,41.7 104.1,41.7 114.8,41.7 116.652,43.552 R15.1
NetR16_1: R16.1 U1.9 | length 42.3
  Top Layer w0.5: U1.9 95.7,34.231 102.369,40.9 104.431,40.9 126.1,40.9 128.052,42.852 R16.1
NetR17_1: R17.1 U1.8 | length 52.5
  Top Layer w0.5: U1.8 96.5,33.9 102.7,40.1 136.5,40.1 139.252,42.852 R17.1
NetU1_1: U1.1 U3.9 | length 47.8
  Top Layer w0.5: U1.1 145.006,29.8 146.95,27.856 U3.9
NetU1_44: U1.44 U3.10 | length 44.1
  Top Layer w0.5: U1.44 144.6,28.3 145.675,27.225 U3.10
VCC: C1.1 C2.1 C3.1 C7.1 C8.2 C10.2 C13.1 C15.1 D2.1 L1.2 P1.2 P2.1 R1.2 U1.7 U1.28 U2.4 U3.16 U4.1 | length 299.7
  Top Layer w0.5: R1.2 P1.2 ; C3.1@98.1,16 U1.28 98.1,25.2 97.3,26 U1.7 97.3,31.9 97.65,32.25 C1.1 97.65,33.55 101.9,37.8 C2.1 ; C13.1@133.55,25.85 C10.2 U3.16@137.88,25.85
  Top Layer w0.6: D2.1 52.5,4.8 57,9.3 v2(57,26.5) ; C15.1 U4.1@87.08,5.15 ; U4.1 87.23,3.37 88.6,2 92.4,2 93.8,3.4 P2.1
  Top Layer w0.8: L1.2@31.9,27.4 L1.2@32.9,27.4 ; v2@97.95,14.3 C3.1
  Top Layer w1: U2.4 29.2,24.7 L1.2@31.9,27.4 ; L1.2@32.9,27.4 46.7,27.4 C7.1 ; C7.1@46.7,26.1 C7.1 ; v2(59.1,26.5) v2(57,26.5) C7.1 ; v2(95.9,14.1) v2@97.75,14.1 ; v2(127.1,25.3) C13.1
  Bottom Layer w0.6: U4.1@87.23,5.1 67.2,5.1 59.1,13.2 v2(59.1,26.5) ; v2(97.9,14.1) v2(95.9,14.1) 93.8,14.1 89.6,18.3 89.6,25.4 87.7,27.3 P1.2 59.9,27.3 v2(59.1,26.5) ; v2(129.1,25.3) v2(127.1,25.3) 118,25.3 104.3,11.6 74,11.6 v2(59.1,26.5)
  Bottom Layer w1: v2(57,26.5) v2(59.1,26.5)
pads on no net: J1.1 J1.4 J1.6 J1.7 J1.8 J1.9 J1.10 J1.11 U1.3 U1.4 U1.5 U1.12 U1.13 U1.25 U1.26 U1.30 U1.31 U1.32 U1.33 U1.34 U1.37 U1.38 U1.39 U1.40 U1.41 U1.42 U1.43 U3.11 U3.12 U3.13 U3.14

## Polygon pours and split planes (outlines as drawn)
GND on Top Layer "Top Layer-No Net" (solid, pour order 1000): 0,100 148.5,100 148.5,83 115.5,83 10.5,83 10.5,65.8 10.5,60 22,60 175,60 175,0 0,0
GND on Bottom Layer "Top Layer-No Net" (solid, pour order 1001): 0,100 148.5,100 148.5,83 115.5,83 10.5,83 10.5,65.8 10.5,60 22,60 175,60 175,0 0,0

## Keep-outs
Keep-Out Layer:
  the board outline again, w0.3

## Silkscreen, mask and mechanical layers (free items; w line width, h text height)
Top Overlay:
  lines w0.254: 22.3,83 29.2,83 ; 25.7,80 25.7,86 ; 51.3,83.5 58.2,83.5 ; 54.7,80.5 54.7,86.5 ; 58.3,83.5 65.2,83.5 ; 61.7,80.5 61.7,86.5 ; 78.1,83.4 85,83.4 ; 81.5,80.4 81.5,86.4 ; 119.6,83.4 126.5,83.4 ; 123,80.4 123,86.4 ; 126.6,83.4 133.5,83.4 ; 130,80.4 130,86.4 ; 145.3,83.4 152.2,83.4 ; 148.7,80.4 148.7,86.4 ; 166.3,83.4 173.2,83.4 ; 169.7,80.4 169.7,86.4 ; 58.2,80.4 65.2,80.4 65.2,86.5 58.2,86.5 ; 58.2,80.4 58.2,86.5 ; 58.2,80.4 58.2,86.5 ; 58.2,80.4 51.2,80.4 51.2,86.5 58.2,86.5 ; 78,80.3 78,86.4 ; 78,80.3 78,86.4 ; 78,80.3 85,80.3 85,86.4 78,86.4 ; 126.5,80.3 119.5,80.3 119.5,86.4 126.5,86.4 ; 126.5,80.3 126.5,86.4 ; 126.5,80.3 126.5,86.4 ; 126.5,80.3 133.5,80.3 133.5,86.4 126.5,86.4 ; 145.2,80.3 152.2,80.3 152.2,86.4 145.2,86.4 ; 145.2,80.3 145.2,86.4 ; 145.2,80.3 145.2,86.4 ; 166.2,80.3 166.2,86.4 ; 166.2,80.3 166.2,86.4 ; 166.2,80.3 173.2,80.3 173.2,86.4 166.2,86.4 ; 22.2,79.9 22.2,86 29.2,86 29.2,79.9 22.2,79.9
  text "24VDC" at 9.9,98.9 h1.52 r270
  text "FAN1" at 27.9,98.9 h1.52 r270
  text "FAN4" at 51,98.9 h1.52 r270
  text "FAN5" at 64,98.9 h1.52 r270
  text "FAN6" at 77.5,98.9 h1.52 r270
  text "FAN7" at 96.2,98.9 h1.52 r270
  text "FAN10" at 120,98.8 h1.52 r270
  text "FAN12" at 145.5,98.8 h1.52 r270
  text "LCD SW" at 151.4,98.8 h1.52 r270
  text "FAN11" at 131.5,98.7 h1.52 r270
  text "24V" at 27.6,88.5 h1.52 r180
  text "-" at 53.8,86.3 h2.5 r180
  text "-" at 57.3,86.3 h2.5 r180
  text "-" at 60.8,86.3 h2.5 r180
  text "-" at 64.3,86.3 h2.5 r180
  text "-" at 80.6,86.2 h2.5 r180
  text "-" at 84.1,86.2 h2.5 r180
  text "-" at 122.1,86.2 h2.5 r180
  text "-" at 125.6,86.2 h2.5 r180
  text "-" at 129.1,86.2 h2.5 r180
  text "-" at 132.6,86.2 h2.5 r180
  text "-" at 147.8,86.2 h2.5 r180
  text "-" at 151.3,86.2 h2.5 r180
  text "-" at 24.8,85.8 h2.5 r180
  text "-" at 28.3,85.8 h2.5 r180
  text "2" at 168.5,85.8 h1.8 r180
  text "1" at 171.7,85.8 h1.8 r180
  text "1" at 171.7,82.8 h1.8 r180
  text "2" at 168.6,82.7 h1.8 r180
  text "+" at 54.2,81.1 h2.5 r90
  text "+" at 57.7,81.1 h2.5 r90
  text "+" at 61.2,81.1 h2.5 r90
  text "+" at 64.7,81.1 h2.5 r90
  text "+" at 81,81 h2.5 r90
  text "+" at 84.5,81 h2.5 r90
  text "+" at 122.5,81 h2.5 r90
  text "+" at 126,81 h2.5 r90
  text "+" at 129.5,81 h2.5 r90
  text "+" at 133,81 h2.5 r90
  text "+" at 148.2,81 h2.5 r90
  text "+" at 151.7,81 h2.5 r90
  text "+" at 25.2,80.6 h2.5 r90
  text "+" at 28.7,80.6 h2.5 r90
  text "F1" at 53.9,79.5 h1 r180
  text "F2" at 57.8,79.5 h1 r180
  text "F3" at 61.2,79.5 h1 r180
  text "F4" at 64.8,79.5 h1 r180
  text "SW2" at 169,79.5 h1 r180
  text "SW1" at 172.8,79.5 h1 r180
  text "F5" at 80.6,79.4 h1 r180
  text "F6" at 84.6,79.4 h1 r180
  text "F7" at 121.8,79.4 h1 r180
  text "F8" at 125.6,79.4 h1 r180
  text "F9" at 129.1,79.4 h1 r180
  text "F10" at 133.1,79.4 h1 r180
  text "F11" at 147.8,79.4 h1 r180
  text "F12" at 151.8,79.4 h1 r180
  text "TOP" at 27.6,79.2 h1.52 r180
  text "TOP" at 82.8,77.8 h1 r180
  text "TOP" at 150,77.8 h1 r180
  text "TOP" at 171.2,77.8 h1 r180
  text "TOP" at 127.9,77.7 h1 r180
  text "TOP" at 60,77.6 h1 r180
Top Solder:
  lines w2: 15,79.7 15.2,79.9
Bottom Solder:
  lines w1: 19.9,74.5 24.6,74.5 30.1,80 34,80 ; 31.3,74.5 35.1,74.5 38.1,77.5 38.1,80.1 ; 42.3,80 42.3,75.2 42.8,74.7 42.8,74.5 ; 46.5,79.95 46.5,79.9 51.9,74.5 54.2,74.5 ; 65.6,74.6 69.3,78.3 69.3,80 ; 73.5,80 73.5,78 76.9,74.6 77.1,74.6 ; 88.5,74.5 93.8,74.5 99.3,80 102.4,80 ; 99.9,74.5 103.6,74.5 106.6,77.5 106.6,79.9 ; 110.8,80 110.8,75.1 111.4,74.5 ; 115,79.9 117.1,79.9 117.424,79.9 122.834,74.49 ; 134.299,74.499 137.288,77.488 137.4,77.6 137.4,79.9 ; 141.6,80 141.6,78.6 145.7,74.5
  lines w1.5: 156.7,85.7 156.7,72.8 162.7,66.8 ; 160.9,80 160.9,85.6 ; 161,80.1 161,79.6 162.7,77.9 162.7,74.5
  lines w3: 15.1,85.5 141.6,85.5 ; 19.3,80 15.1,80 15.1,70.7 19,66.8 145.2,66.8

## Text inside footprints (layer, text, board x,y; h text height)
C5: Top Overlay "+" at 18.36,2.495 h2.5 r90
C7: Top Overlay "+" at 39.895,26.24 h2.5
J1: Top Overlay "6" at 151.555,4.975 h1.5 r180; Top Overlay "9" at 143.245,4.975 h1.5 r180; Top Overlay "5" at 141.86,14.375 h1.5 r180; Top Overlay "1" at 152.69,14.375 h1.5 r180